# Altium PCB solar-powered-remote-water-level-relay.PcbDoc
Units mil, origin at the board's own origin, x right, y up, seen from the top; angles counter-clockwise.
Board outline 1785.9 x 3282.91 mil, 2 copper layers (TOP, BOTTOM), stack 3.156 mil thick; 50 components, 70 nets, 187 pads, 0 vias.
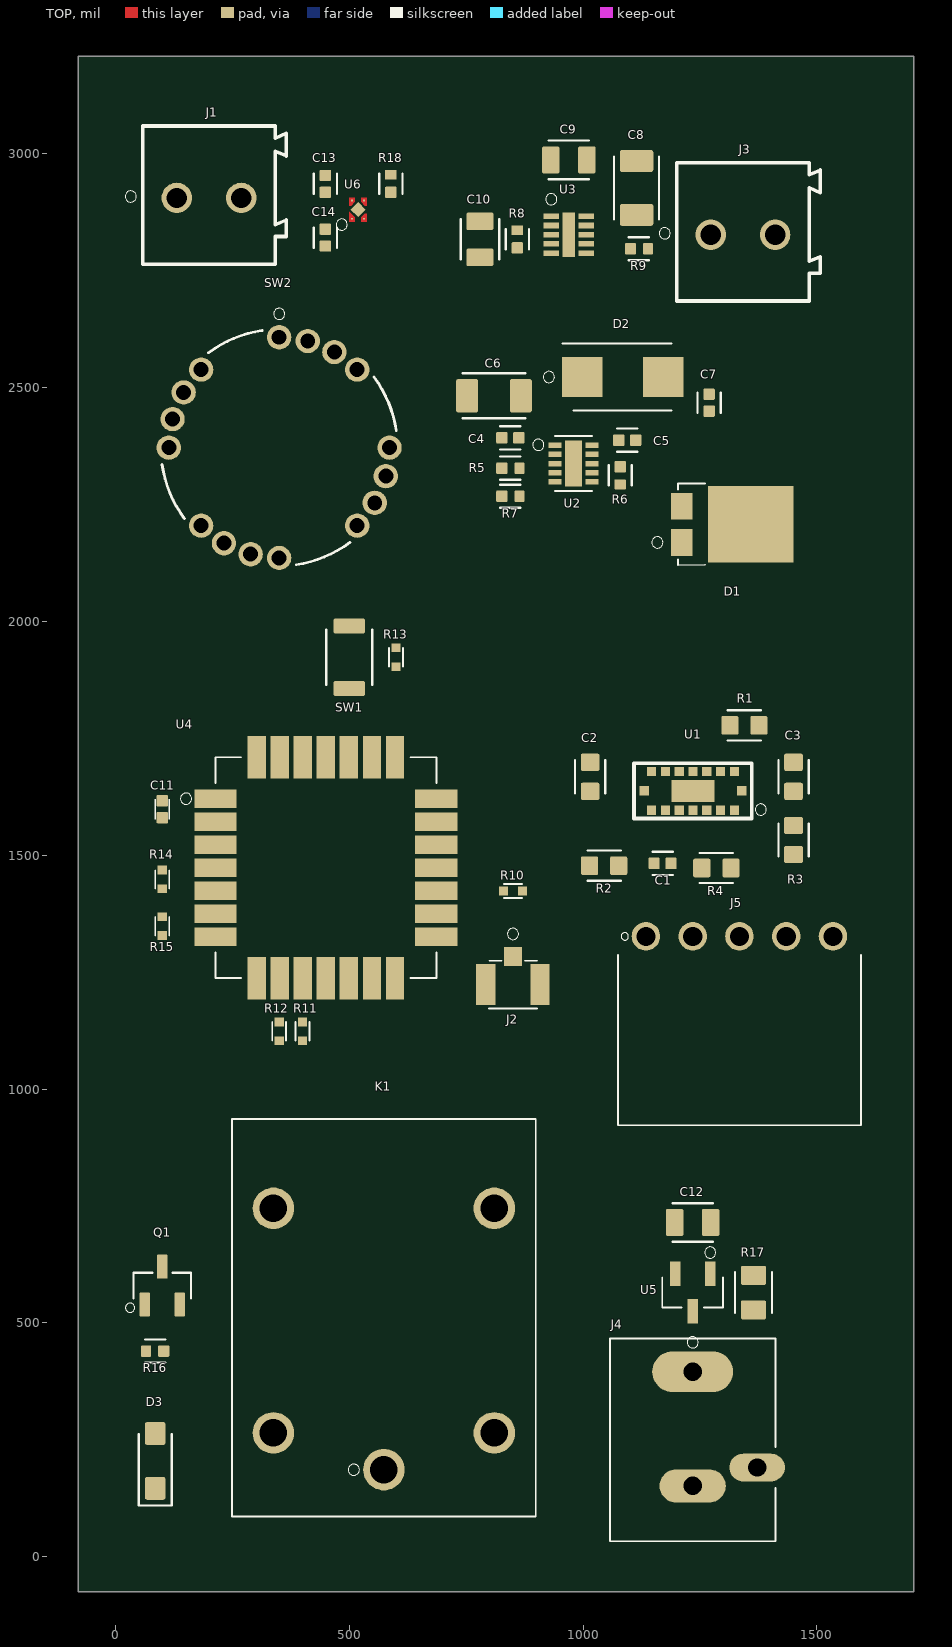
[diagram p0: TOP view]
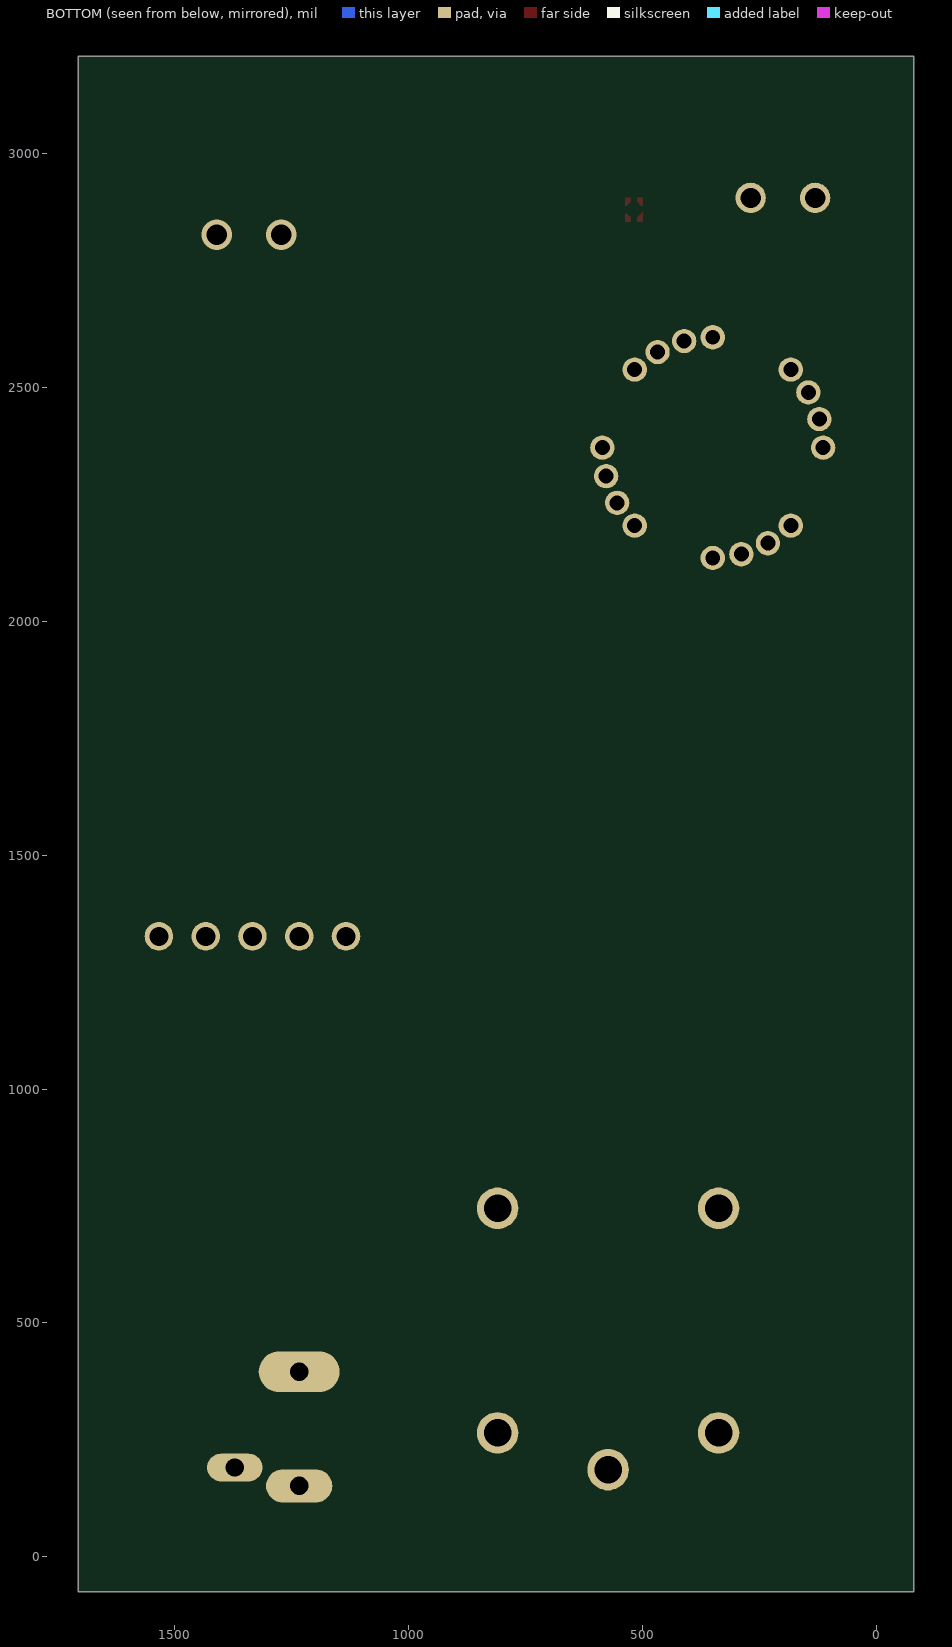
[diagram p1: BOTTOM view, seen from below]

## Layer stack, top to bottom
Top Solder: solder mask 0.4, Solder Resist, Dk 3.5
TOP: signal copper 1.378
Dielectric1: core 0.4, PP-006, Dk 3.5
BOTTOM: signal copper 1.378
Bottom Solder: solder mask 0.4, Solder Resist, Dk 3.5

## Board outline
-79.36,-74.41 -79.36,3208.5 1706.54,3208.5 1706.54,-74.41

## Components (designator, comment, footprint, x,y, rotation, side; value= is the part's Value field where it differs from the comment)
C1 "0.1uF" ?#1 1169.88,1482.95 r180 top
C2 "4.7uF" ?#2 1014.88,1667.95 r90 top
C3 "4.7uF" ?#2 1449.88,1667.95 r90 top
C4 "0.1uF" ?#1 844.29,2392.87 r180 top
C5 "1uF" ?#1 1094.29,2387.87 r0 top
C6 "10uF" ?#3 809.29,2482.87 r180 top
C7 "1uF" ?#1 1269.29,2467.87 r270 top
C8 "1uF" ?#3 1114.29,2927.17 r90 top
C9 "100nF" ?#4 969.29,2987.17 r0 top
C10 "470nF" ?#4 779.29,2817.17 r270 top
C11 "4.7uF" ?#1 100,1598.62 r270 top
C12 "22uF" ?#4 1234.25,715 r0 top
C13 "1 uF" ?#1 448.7,2935.91 r90 top
C14 "1 uF" ?#1 448.7,2820.91 r270 top
D1 "FSV1045V" ?#5 1319.29,2207.87 r180 top
D2 "STPS3H100U" ?#6 1084.29,2522.87 r0 top
D3 "" ?#7 85,205 r90 top
J1 "691214110002S" ?#8 200,2905.91 r0 top
J2 "U.FL-R-SMT-1(01)" ?#9 850,1223.62 r180 top
J3 "691214110002S" ?#8 1341.73,2827.17 r0 top
J4 "PJ-044BH" ?#10 1234.25,250 r0 top
J5 "SSW-105-02-F-S-RA" ?#11 1134.25,1326.77 r0 top
K1 "G5LE-14_DC3" ?#12 810,265 r90 top
Q1 "MMBT2222A,215" ?#13 100,580 r90 top
R1 "47k" ?#2 1344.88,1777.95 r180 top
R2 "47k" ?#2 1044.88,1477.95 r180 top
R3 "47k" ?#2 1449.88,1532.95 r270 top
R4 "47k" ?#2 1284.88,1472.95 r180 top
R5 "470" ?#14 844.29,2327.87 r0 top
R6 "10k" ?#14 1079.29,2312.87 r270 top
R7 "10k" ?#14 844.29,2267.87 r0 top
R8 "100m" ?#14 859.29,2817.17 r90 top
R9 "2k" ?#14 1119.29,2797.17 r0 top
R10 "22Ω" ?#15 850,1423.62 r0 top
R11 "22Ω" ?#15 400,1123.62 r90 top
R12 "22Ω" ?#15 350,1123.62 r90 top
R13 "470Ω" ?#15 600,1923.62 r90 top
R14 "10kΩ" ?#15 100,1448.62 r90 top
R15 "10kΩ" ?#15 100,1348.62 r270 top
R16 "10k" ?#14 85,440 r180 top
R17 "16V 200A" ?#16 1364.25,565 r270 top
R18 "10k" ?#14 588.7,2935.91 r90 top
SW1 "B3U-1000P" ?#17 500,1923.62 r90 top
SW2 "MRK403-A" ?#18 350,2607.87 r0 top
U1 "VL53L5CXV0GC_1" ?#19 1234.88,1637.95 r0 top
U2 "BQ24210DQCT" ?#20 979.29,2337.87 r0 top
U3 "LTC2959IDDB#TRMPBF" ?#21 969.29,2827.17 r0 top
U4 "317990687" ?#22 450,1473.62 r0 top
U5 "SI2319DS-T1-E3" ?#23 1234.25,565 r180 top
U6 "" ?#24 518.7,2880.91 r0 top

## Footprints (in the part's own frame and the unit in brackets; to place one, negate y for a bottom-side part, rotate by r counter-clockwise, add the part's x,y. Pads: shape width x height; smd on the part's side, far side on the other; paste and mask are expansions set on the pad)
?#1 [mm]
  rrect20% 0.61x0.629 smd: 1(-0.46,0) 2(0.46,0)
  silkscreen extent -0.55,-0.63 0.55,0.63
?#2 [mm]
  rrect20% 0.935x1.015 smd: 1(-0.79,0) 2(0.79,0)
  silkscreen extent -0.9,-0.82 0.9,0.82
?#3 [mm]
  rrect20% 1.195x1.815 smd: 1(-1.46,0) 2(1.46,0)
  silkscreen extent -1.7,-1.22 1.7,1.22
?#4 [mm]
  rrect20% 0.959x1.465 smd: 1(-0.978,0) 2(0.978,0)
  silkscreen extent -1.1,-1.05 1.1,1.05
?#5 [mm]
  rect 1.15x1.45 smd: 1(2.75,0.985) 2(2.75,-0.985)
  rect 4.65x4.15 smd: 3(-1,0)
  silkscreen extent 1.5,-2.22 4.38,2.22
?#6 [mm]
  rect 2.2x2.15 smd: 1(-2.2,0) 2(2.2,0)
  silkscreen extent -4.3,-1.81 2.67,1.81
?#7 [mm]
  rrect20% 1.235x1.115 smd: A(1.49,0) K(-1.49,0)
  silkscreen extent -2.42,-0.9 1.45,0.9
?#8 [mm]
  round 1.65 hole 1.1: 1(-1.75,0) 2(1.75,0)
  silkscreen extent -4.55,-3.6 4.2,3.9
?#9 [mm]
  rect 0.991x1.041 smd: 1(0,-1.53)
  rect 1.041x2.21 smd: 2(-1.475,-0.005) 3(1.475,-0.005)
  silkscreen extent -1.3,-3.05 1.3,1.3
?#10 [mm]
  rrect100% 4.4x2.2 hole 1: 1(0,3.7)
  rrect100% 3.6x1.8 hole 1: 2(0,-2.5)
  rrect100% 3.016x1.508 hole 1: 3(3.5,-1.5)
  silkscreen extent -4.5,-5.5 4.5,5.6
?#11 [mm]
  round 1.55 hole 1.04: 1(0,0) 2(2.54,0) 3(5.08,0) 4(7.62,0) 5(10.16,0)
  silkscreen extent -1.53,-10.26 11.68,0.2
?#12 [mm]
  round 2.25 hole 1.5: 1(-2,6) 2(0,0) 3(12.2,0) 4(12.2,12) 5(0,12)
  silkscreen extent -4.55,-2.25 17.05,14.25
?#13 [mm]
  rrect20% 1.298x0.589 smd: 1(-1.027,0.95) 2(-1.027,-0.95) 3(1.027,0)
  silkscreen extent -1.45,-1.56 0.7,2
?#14 [mm]
  rrect20% 0.61x0.629 smd: 1(-0.46,0)
  rrect20% 0.538x0.629 smd: 2(0.496,0)
  silkscreen extent -0.55,-0.63 0.55,0.63
?#15 [mm]
  rect 0.475x0.5 smd: 1(-0.512,0) 2(0.512,0)
  silkscreen extent -0.5,-0.38 0.5,0.38
?#16 [mm]
  rrect20% 1.035x1.379 smd: 1(-0.94,0) 2(0.94,0)
  silkscreen extent -1.1,-1 1.1,1
?#17 [mm]
  rrect20% 0.8x1.7 smd: 1(-1.7,0) 2(1.7,0)
  silkscreen extent -1.5,-1.25 1.5,1.25
?#18 [mm]
  round 1.321 hole 0.813: 1(0,0) 2(1.551,-0.204) 3(2.997,-0.803) 4(4.239,-1.756) 5(5.994,-5.994) 6(5.79,-7.546) 7(5.191,-8.992) 8(4.239,-10.233) 9(0,-11.989) 10(-1.551,-11.785) 11(-2.997,-11.186) 12(-4.239,-10.233) 13(-5.994,-5.994) 14(-5.79,-4.443) 15(-5.191,-2.997) 16(-4.239,-1.756)
  silkscreen extent -6.36,-12.35 6.36,1.57
?#19 [mm]
  rect 0.5x0.5 smd: A1(2.25,-1.05) A2(1.5,-1.05) A3(0.75,-1.05) A4(0,-1.05) A5(-0.75,-1.05) A6(-1.5,-1.05) A7(-2.25,-1.05) B1(2.65,0) B7(-2.65,0) C1(2.25,1.05) C2(1.5,1.05) C3(0.75,1.05) C4(0,1.05) C5(-0.75,1.05) C6(-1.5,1.05) C7(-2.25,1.05)
  rect 2.316x1.2 smd: B4(0,0)
  silkscreen extent -3.2,-1.5 3.99,1.5
?#20 [mm]
  rect 0.7x0.3 smd: 1(-1,1) 2(-1,0.5) 3(-1,0) 4(-1,-0.5) 5(-1,-1) 6(1,-1) 7(1,-0.5) 8(1,0) 9(1,0.5) 10(1,1)
  rect 0.94x2.5 smd: 11(0,0)
  silkscreen extent -2.21,-1.5 1,1.5
?#21 [mm]
  rect 0.85x0.3 smd: 1(-0.95,1) 2(-0.95,0.5) 3(-0.95,0) 4(-0.95,-0.5) 5(-0.95,-1) 6(0.95,-1) 7(0.95,-0.5) 8(0.95,0) 9(0.95,0.5) 10(0.95,1)
  rect 0.69x2.44 smd: 11(0,0)
  silkscreen extent -1.25,1.62 -0.65,2.23
?#22 [mm]
  rect 2.3x1 smd: 1(-6,3.75) 2(-6,2.5) 3(-6,1.25) 4(-6,0) 5(-6,-1.25) 6(-6,-2.5) 7(-6,-3.75) 15(6,-3.75) 16(6,-2.5) 17(6,-1.25) 18(6,0) 19(6,1.25) 20(6,2.5) 21(6,3.75)
  rect 1x2.3 smd: 8(-3.75,-6) 9(-2.5,-6) 10(-1.25,-6) 11(0,-6) 12(1.25,-6) 13(2.5,-6) 14(3.75,-6) 22(3.75,6) 23(2.5,6) 24(1.25,6) 25(0,6) 26(-1.25,6) 27(-2.5,6) 28(-3.75,6)
  silkscreen extent -7.9,-6 6,6
?#23 [mm]
  rect 0.559x1.321 smd: 1(-0.95,-1.016) 2(0.95,-1.016) 3(0,1.016)
  silkscreen extent -1.65,-2.48 1.65,0.81
?#24 [mm]
  rect 0.1x0.1 smd: 1(-0.325,-0.5) 2(0.325,-0.5) 3(0.325,0.5) 4(-0.325,0.5)
  rect 0.58x0.58 smd rot 45: 5(0,0)
  TOP region: -0.475,0.65 -0.475,0.22 -0.375,0.22 -0.175,0.42 -0.175,0.65
  TOP region: 0.475,0.65 0.475,0.22 0.375,0.22 0.175,0.42 0.175,0.65
  TOP region: 0.475,-0.65 0.475,-0.22 0.375,-0.22 0.175,-0.42 0.175,-0.65
  TOP region: -0.475,-0.65 -0.175,-0.65 -0.175,-0.42 -0.475,-0.12
  silkscreen extent -1.19,-1.12 -0.58,-0.51

## Nets (pads, with @x,y where several pads share a name; then routed paths per layer and width w, separated by ;. In a path a pad name is that pad's centre, name@x,y a point inside that pad or via, vN(x,y) a via of type N, cw(c..) or ccw(c..) an arc to the next point about the centre after c; other vN are vias at no path point)
1: J5.1
2: SW2.2
3: J5.3
3_1: SW2.3
4: SW2.4
5: J5.5
6: SW2.6
7: SW2.7
8: SW2.8
10: SW2.10
11: SW2.11
12: SW2.12
14: SW2.14 U4.13
15: SW2.15
16: SW2.16
COM: K1.1
GND: C1.2 C2.2 C3.2 C4.2 C5.2 C6.2 C7.2 C8.2 C9.2 C11.2 C12.2 C13.2 C14.2 J1.2 J2.2 J2.3 J3.2 J4.2 J4.3 J5.4 Q1.3 R3.1 R5.1 R7.1 R13.1 R16.1 R17.1 SW2.1 SW2.5 SW2.9 SW2.13 U1.A2 U1.A6 U1.A7 U1.B4 U1.C1 U1.C5 U1.C6 U1.C7 U2.3 U2.11 U3.10 U3.11 U4.2 U4.14 U4.16 U4.22 U5.1 U6.2 U6.5
GPIO: R9.1 U3.8
I2C_RST: R3.2 U1.A1
INT: R4.2 U1.A3
IO1: J3.1 K1.4
LPN: R2.2 U1.A5
MISO: U4.26
MOSI: U4.27
N_AUX5: U2.8
NET1: R5.2 U2.2
NET2: R6.2 U2.6 U2.7
NET3: R7.2 U2.4 U2.5
NET4: C8.1 U3.9
NET5: C10.2 U3.4
NET6: C10.1 U3.3
NET7: R13.2 SW1.2
NET8: SW1.1 U4.20
NET9: R10.1 U4.17
NET10: J2.1 U4.15
NET11: R11.2 U4.10
NET12: R12.2 U4.9
NET13: D3.A K1.5 Q1.2
NET14: J4.1 R17.2 U5.3
NO: K1.3 U4.11
NRST: J5.2 R10.2
PA0: U4.23
PA2: U4.19
PA3: U4.18
PA9: U4.21
PA13: U4.3
PA14: R18.1 U4.4 U6.3
PB3: U4.8
PB4: U4.7
PB9: U4.25
PC1: U4.12
RSVD6: R1.2 U1.C2
RXD: R11.1
SCK: U4.24
SCL: R14.1 U1.C4 U4.5
SCL_1: U3.6
SDA: R15.1 U1.C3 U4.6
SDA_1: U3.7
SW: J1.1 Q1.1 R16.2
TXD: R12.1
VBAT: C5.1 C12.1 D1.1 D1.2 R6.1 U2.10 U5.2
VBUS: C4.1 C6.1 D2.1
VCC: C9.1 C13.1 R8.2 R18.2 U3.1 U3.2 U6.4
VCC_1: D3.K K1.2
VDD: R9.2
VDD_1: C11.1 R14.2 R15.2 U4.1
VOUT: C1.1 C2.1 C3.1 C14.1 R1.1 R2.1 R4.1 U1.A4 U1.B1 U1.B7 U6.1
VOUT_1: D1.3 R8.1 U3.5
VSOLAR: C7.1 D2.2 U2.1
"": 
pads on no net: U2.9 U4.28